# Altium PCB Alim.PcbDoc
Units mm, origin at the board's own origin, x right, y up, seen from the top; angles counter-clockwise.
Board outline 60 x 60 mm, 2 copper layers (Top Layer, Bottom Layer); 35 components, 13 nets, 87 pads, 36 vias.
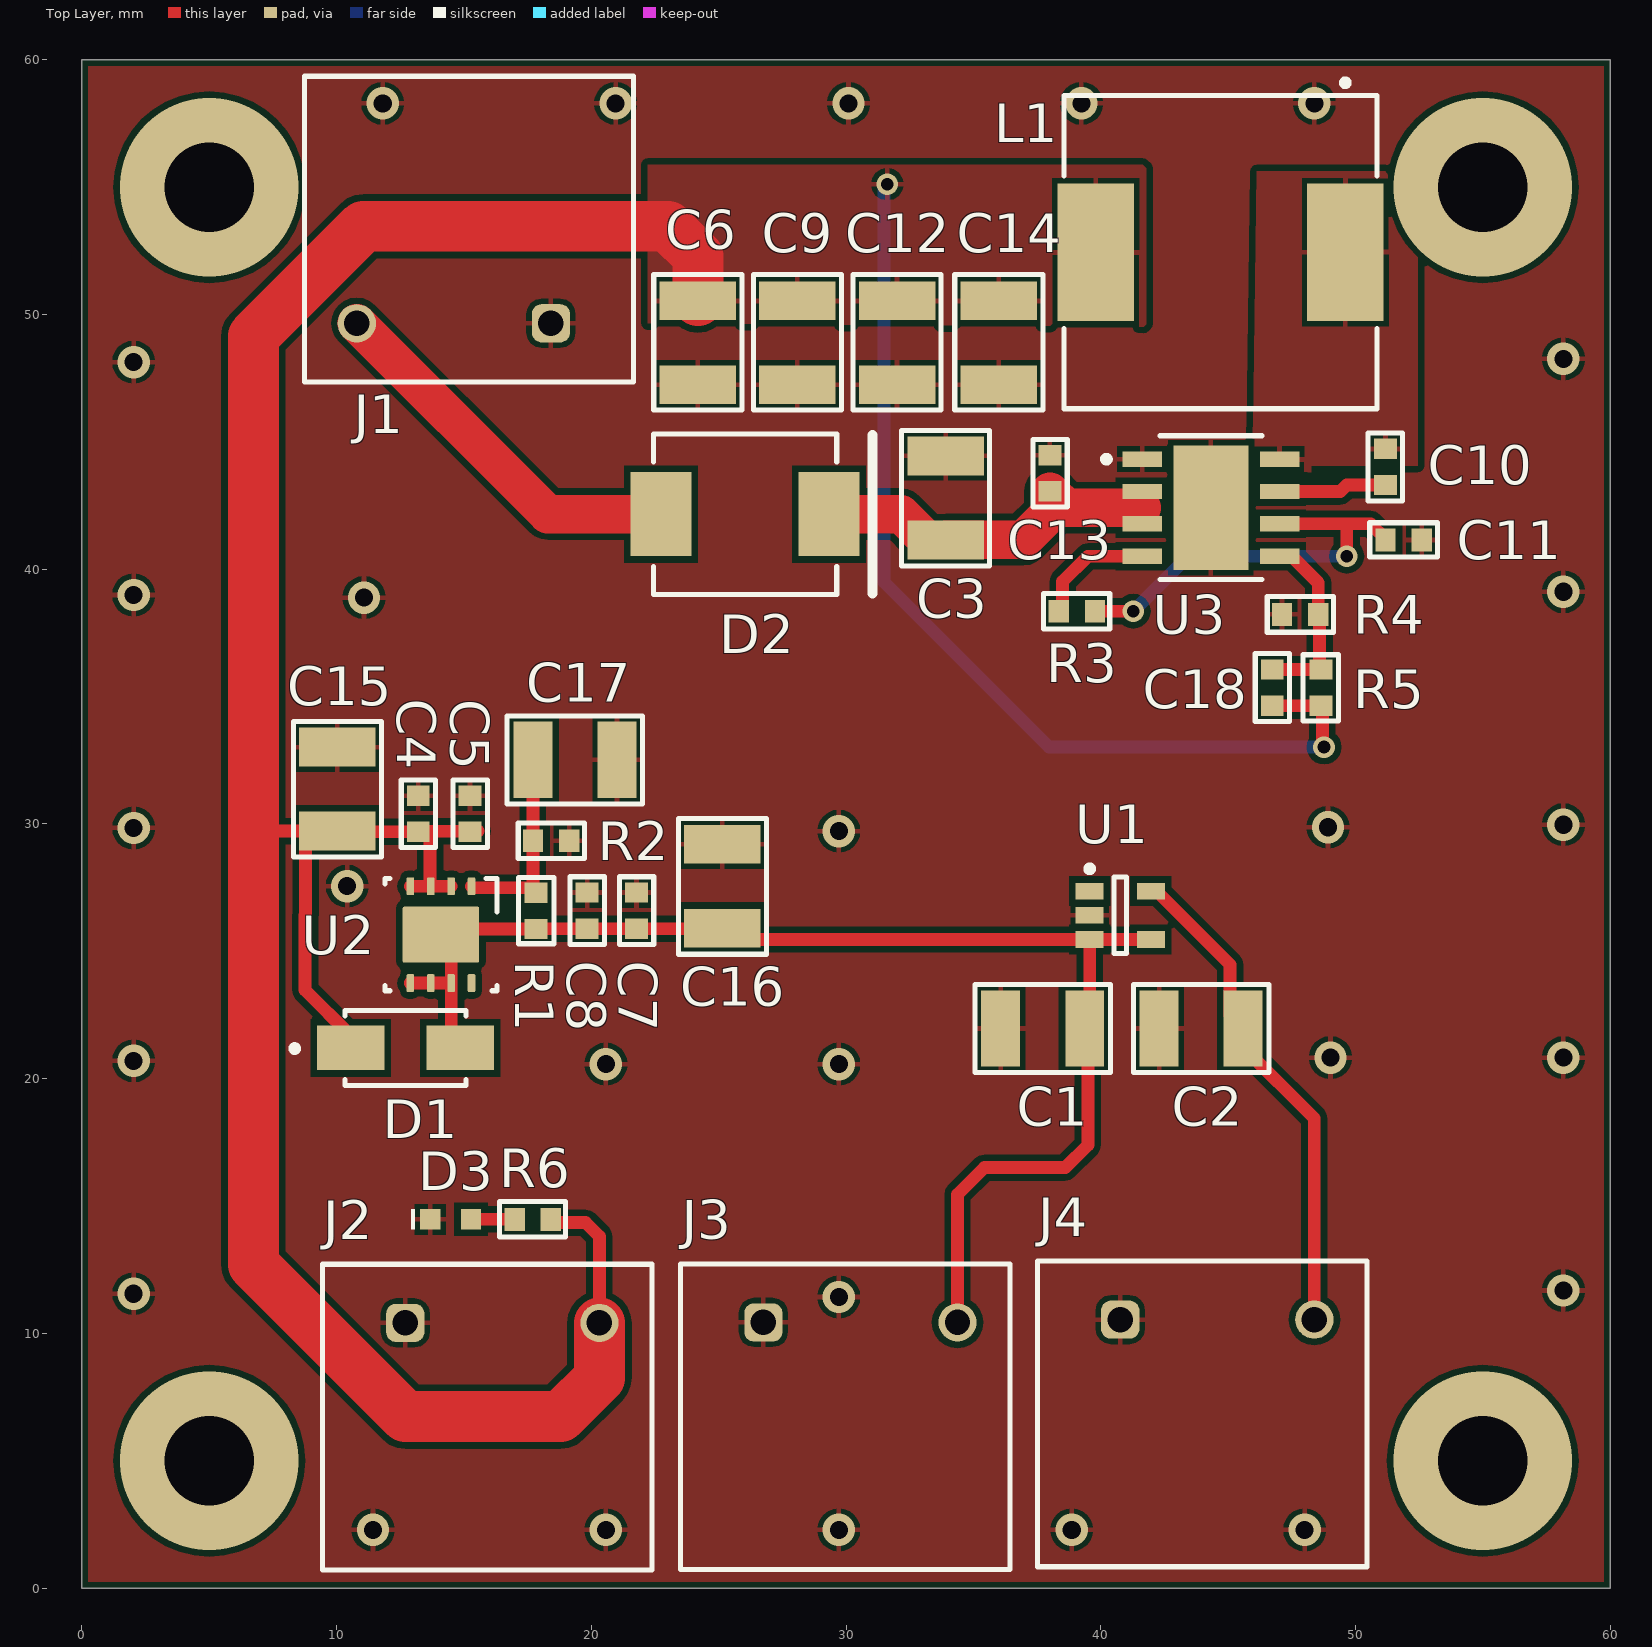
[diagram p0: Top Layer view]
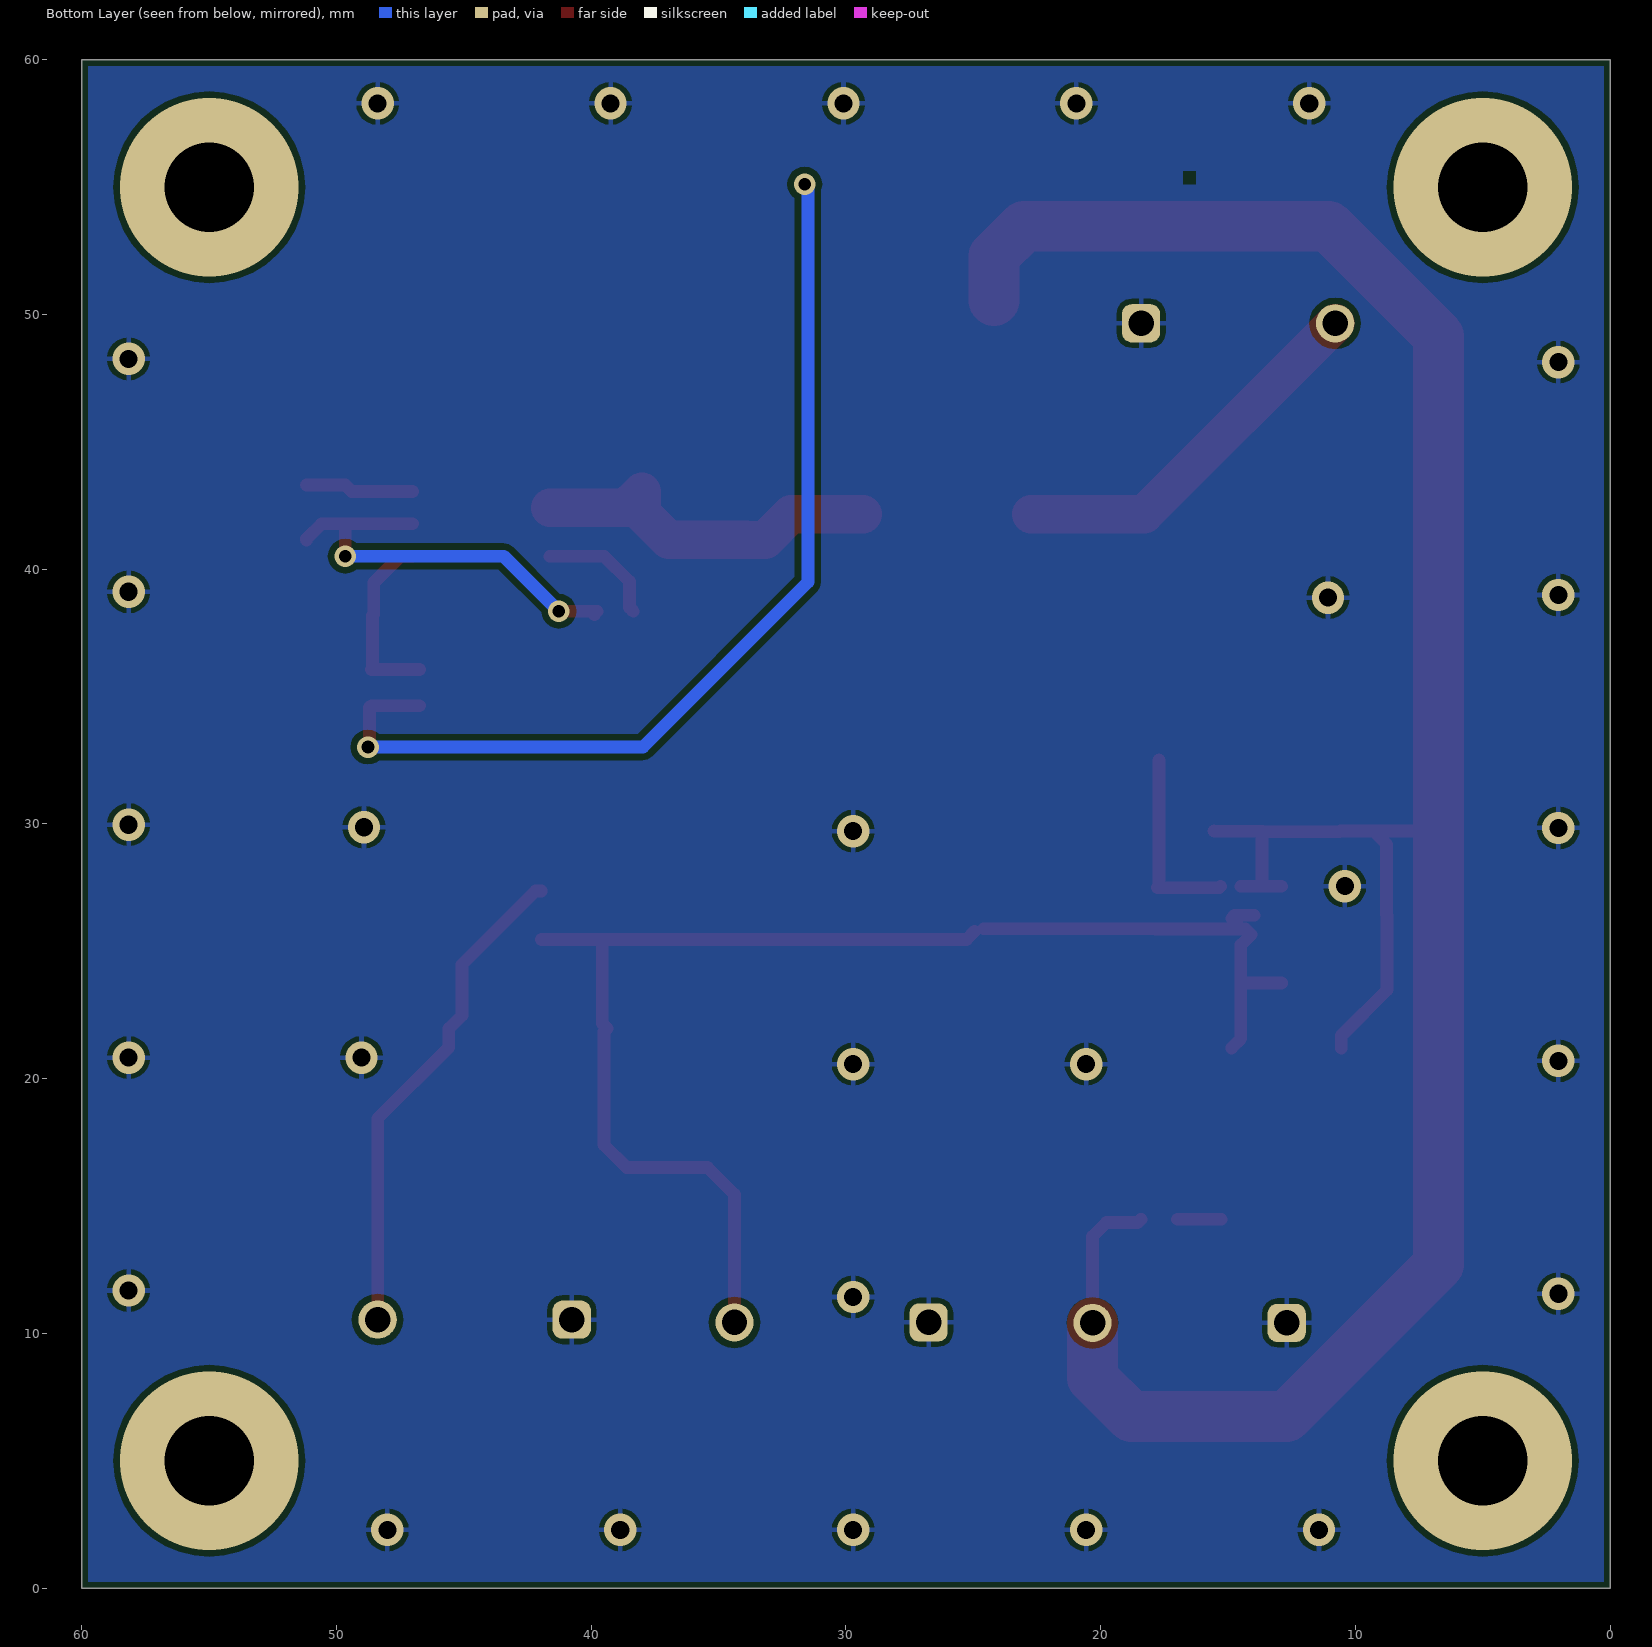
[diagram p1: Bottom Layer view, seen from below]

## Layer stack, top to bottom
Top Solder: solder mask 0.0102, Solder Resist, Dk 3.5
Top Layer: signal copper 0.0356
Dielectric 1: dielectric 0.32, FR-4, Dk 4.8
Bottom Layer: signal copper 0.0356
Bottom Solder: solder mask 0.0102, Solder Resist, Dk 3.5

## Board outline
0,0 0,60 60,60 60,0

## Design rules (kind name [scope] priority, off if disabled: settings)
BoardOutlineClearance [All] p1: gap=0.25 ignorepadtopadclearanceinfootprint=FALSE
Clearance Clearance-xPP-xTP-xTT [All] p1: gap=0.25 ignorepadtopadclearanceinfootprint=FALSE
ComponentClearance [All] p1: gap=0.25 collisioncheckmode=3 verticalgap=0.25 showdistances=FALSE
DiffPairsRouting [All] p1: maxlimit=0.25 minlimit=0.25 mostfreqgap=0.25 toplayer_minwidth=0.381 toplayer_maxwidth=0.381 toplayer_prefwidth=0.381 bottomlayer_minwidth=0.381 bottomlayer_maxwidth=0.381 bottomlayer_prefwidth=0.381 maxuncoupledlength=12.5
Height [All] p1: minheight=0 maxheight=25 prefheight=12.5
HoleSize HoleSize-PTH [All] p1: absolutevalues=TRUE maxlimit=5 minlimit=0.25 maxpercent=80.000 minpercent=20.000
HoleToHoleClearance [All] p1: gap=0.35 allowstackedmicrovias=TRUE
MinimumAnnularRing "Minimum IAR  >0.45mm" [((ObjectKind = 'Pad') OR (ObjectKind = 'Via')) And (Layer = 'MultiLayer') And (HoleDiameter > AsMM(0.45))] p1: minimumring=0.175 // minimum inner annular ring for pads > 0.45mm finished hole size
MinimumAnnularRing "Minimum IAR <=0.45mm" [((ObjectKind = 'Pad') OR (ObjectKind = 'Via')) And (Layer = 'MultiLayer') And (HoleDiameter <= AsMM(0.45))] p2: minimumring=0.175 // minimum inner annular ring for pads <= 0.45mm finished hole size
MinimumSolderMaskSliver [All] p1: minsoldermaskwidth=0.08
NetAntennae [All] p1 off: netantennaetolerance=0
PlaneClearance PlaneClearance-IPI [All] p1: clearance=0.25
PlaneConnect [All] p1: planeconnectstyle=Relief reliefexpansion=0.175 reliefentries=4 reliefconductorwidth=0.2 reliefairgap=0.2
PolygonConnect PolygonConnect-xTW [All] p1: connectstyle=Relief reliefconductorwidth=0.2 reliefentries=4 polygonreliefangle="90 Angle" airgapwidth=0.2
RoutingCorners [All] p1: cornerstyle=45-Degree minsetback=2.5 maxsetback=2.5
RoutingVias "RoutingVias > 0.45mm" [(ObjectKind = 'Via') And (HoleDiameter > AsMM(0.45))] p1: holewidth=0.5 width=0.85 viastyle="Through Hole" minholewidth=0.5 minwidth=0.85 maxholewidth=0.9 maxwidth=1.25 // finishet hole size > 0.45mm
RoutingVias "RoutingVias <= 0.45mm" [(ObjectKind = 'Via') And (HoleDiameter <= AsMM(0.45))] p2: holewidth=0.3 width=0.65 viastyle="Through Hole" minholewidth=0.25 minwidth=0.6 maxholewidth=0.45 maxwidth=0.8 // finishet hole size <= 0.45mm
SilkToSilkClearance [All] p1: silktosilkclearance=0.25
SilkToSolderMaskClearance SilkscreenOverComponentPads [IsPad] p1: minsilkscreentomaskgap=0.2 clearancetoexposedcopper=TRUE
SolderMaskExpansion [All] p1: expansion=0
UnRoutedNet [All] p1: checkbadconnections=TRUE
Width [All] p1: maxlimit=2 minlimit=0.25 preferedwidth=0.5 minimp=50.000000 maximp=50.000000 favimp=50.000000
17 further rules are at their usual default settings.

## Components (designator, comment, footprint, x,y, rotation, side; value= is the part's Value field where it differs from the comment)
C1 "CMS_1210" CONDENSATEUR_CMS_1210 36.07,21.971 r0 top value=10µF
C2 "CMS_1210" CONDENSATEUR_CMS_1210 42.291,21.971 r0 top value=10µF
C3 "CMS_1210" CONDENSATEUR_CMS_1210 33.909,44.45 r270 top value=10µF
C4 "CMS_0603" CONDENSATEUR_CMS_0603 13.208,31.115 r270 top value=1µF
C5 "CMS_0603" CONDENSATEUR_CMS_0603 15.24,31.115 r270 top value=100nF
C6 "CMS_1210" CONDENSATEUR_CMS_1210 24.183,47.246 r90 top value=22µF
C7 "CMS_0603" CONDENSATEUR_CMS_0603 21.774,27.31 r270 top value=1µF
C8 "CMS_0603" CONDENSATEUR_CMS_0603 19.837,27.31 r270 top value=100nF
C9 "CMS_1210" CONDENSATEUR_CMS_1210 28.094,47.246 r90 top value=22µF
C10 "CMS_0603" CONDENSATEUR_CMS_0603 51.181,43.307 r90 top value=0.1µF
C11 "CMS_0603" CONDENSATEUR_CMS_0603 51.181,41.148 r0 top value=1µF
C12 "CMS_1210" CONDENSATEUR_CMS_1210 32.004,47.246 r90 top value=22µF
C13 "CMS_0603" CONDENSATEUR_CMS_0603 38.006,44.482 r270 top value=220nF
C14 "CMS_1210" CONDENSATEUR_CMS_1210 35.999,47.246 r90 top value=22µF
C15 "CMS_1210" CONDENSATEUR_CMS_1210 10.033,33.02 r270 top value=10µF
C16 "CMS_1210" CONDENSATEUR_CMS_1210 25.146,29.208 r270 top value=10µF
C17 "CMS_1210" CONDENSATEUR_CMS_1210 21.01,32.517 r180 top value=10µF
C18 "CMS_0603" CONDENSATEUR_CMS_0603 46.736,36.068 r270 top value=NC
D1 "S1M" DO-214AC 12.709,21.209 r0 top
D2 "S5M" DO-214AB 26.035,42.164 r0 top
D3 "150060RS75000" LED_0603 14.478,14.478 r0 top
J1 "691417420002" 691417420002 15.2,53.357 r180 top locked
J2 "691417420002" 691417420002 15.915,6.714 r0 top locked
J3 "691417420002" 691417420002 29.972,6.731 r0 top locked
J4 "691417420002" 691417420002 43.982,6.841 r0 top locked
L1 "8µH" WE-PDA_1260 44.704,52.451 r270 top
R1 "RESISTANCE_CMS_0603" RESISTANCE_CMS_0603 17.837,27.3 r270 top value=1kOhm
R2 "RESISTANCE_CMS_0603" RESISTANCE_CMS_0603 19.132,29.342 r180 top value=1,58kOhm
R3 "RESISTANCE_CMS_0603" RESISTANCE_CMS_0603 38.354,38.354 r0 top value=NC
R4 "RESISTANCE_CMS_0603" RESISTANCE_CMS_0603 48.539,38.227 r180 top value=24.9kOhm
R5 "RESISTANCE_CMS_0603" RESISTANCE_CMS_0603 48.641,34.646 r90 top value=100kOhm
R6 "RESISTANCE_CMS_0603" RESISTANCE_CMS_0603 16.993,14.478 r0 top value=520Ohm
U1 "LM4128AMF-1.8" SOT23-5 40.767,26.416 r0 top
U2 "TLV1117IDRJR" WSON-8 14.097,25.654 r270 top
U3 "LMR33630ADDAR" HSOIC 44.323,42.418 r0 top

## Footprints (in the part's own frame and the unit in brackets; to place one, negate y for a bottom-side part, rotate by r counter-clockwise, add the part's x,y. Pads: shape width x height; smd on the part's side, far side on the other; paste and mask are expansions set on the pad)
691417420002 [mm] "7.62 mm 45deg Entry Screwless, 2p"
  rrect50% 1.5x1.5 hole 1: 1(-3.215,3.7)
  round 1.5 hole 1: 2(4.405,3.7)
  silkscreen extent -6.47,-6 6.46,6
CONDENSATEUR_CMS_0603 [mm] "CONDENSATEUR CMS 0603 ; DIMENSIONS : 1.6mm x 0.86mm"
  rect 0.8x0.9 smd: 1(0,0) 2(1.422,0)
  silkscreen extent -0.62,-0.67 2.04,0.68
CONDENSATEUR_CMS_1210 [mm] "CONDENSATEUR CMS 1210 ; DIMENSIONS : 3.2mm x 2.5mm"
  rect 1.524x3 smd: 1(0,0) 2(3.3,0)
  silkscreen extent -1,-1.73 4.32,1.73
DO-214AB [mm] "Molded Diode, 2-Leads, Body 7.11x6.22mm"
  rect 2.4x3.3 smd: 1(-3.3,0) 2(3.3,0)
  silkscreen extent -3.6,-3.15 5,3.15
DO-214AC [mm] "SMD Doide"
  rect 2.65x1.75 smd paste+0 mask+0: 1(-2.15,0) 2(2.15,0)
  silkscreen extent -4.47,-1.48 2.37,1.48
HSOIC [mm] "SOIC with power pad"
  rect 1.55x0.6 smd paste+0 mask+0: 1(-2.7,1.905) 2(-2.7,0.635) 3(-2.7,-0.635) 4(-2.7,-1.905) 5(2.7,-1.905) 6(2.7,-0.635) 7(2.7,0.635) 8(2.7,1.905)
  rect 2.95x4.9 smd paste-1000 mask-1000: 9(0,0)
  silkscreen extent -4.22,-2.83 2,2.83
LED_0603 [mm] "SMD Mono-color Chip LED, body 1.6x0.8mm"
  rect 0.8x0.8 smd: 1(-0.8,0) 2(0.8,0)
  silkscreen extent -1.55,-0.4 -1.4,0.4
RESISTANCE_CMS_0603 [mm] "RESISTANCE CMS 0603 ; DIMENSIONS : 1.6mm x 0.8mm"
  rect 0.8x0.9 smd: 1(0,0) 2(1.422,0)
  silkscreen extent -0.6,-0.7 2,0.7
SOT23-5 [mm] "SOT23, 5-Leads, Body 2.9x1.6mm, Pitch 0.95mm, Lead Span 2.8mm, IPC Medium Density"
  rect 1.1x0.65 smd: 1(-1.2,0.95) 2(-1.2,0) 3(-1.2,-0.95) 4(1.2,-0.95) 5(1.2,0.95)
  silkscreen extent -1.32,-1.5 0.25,1.95
WE-PDA_1260 [mm] "SMD Shielded Power Inductor, 2-leads, body 12x12mm"
  rect 5.4x3 smd: 1(0,4.9) 2(0,-4.9)
  silkscreen extent -6.77,-6.15 6.15,6.15
WSON-8 [mm] "SON, 8-Leads, Body 4x4mm, Pitch 0.8mm, Thermal Pad 3x2.2mm, TI Recommended"
  rrect33% 0.7x0.3 smd: 1(-1.9,1.2) 2(-1.9,0.4) 3(-1.9,-0.4) 4(-1.9,-1.2) 5(1.9,-1.2) 6(1.9,-0.4) 7(1.9,0.4) 8(1.9,1.2)
  rrect5% 2.2x3 smd paste-1.1: 9(0,0)
  silkscreen extent -2.2,-2.2 2.2,2.2

## Part data
C1 C2 C3 C6 C9 C12 C14 C15 C16 C17: library part CONDENSATEUR_CMS_CER_1210, "CONDENSATEUR CMS CERAMIQUE 1210", Type=CMS_1210
C4 C5 C7 C8 C10 C11 C13 C18: library part CONDENSATEUR_CMS_CER_0603, "CONDENSATEUR CMS CERAMIQUE 0603", Type=CMS_0603
D1: "DIODE GEN PURP 1KV 1A SMA", Average Rectified Current=1A, Capacitance=12pF, Case/Package=SMA, Forward Voltage=1.1V, Manufacturer 1="ON Semiconductor / Fairchild", Max Forward Surge Current (Ifsm)=30A, Max Operating Temperature=150°C, Max Repetitive Reverse Voltage (Vrrm)=1kV, Max Surge Current=40A, Min Operating Temperature=-55°C, Package Quantity=1, Peak Reverse Current=1uA, Power Dissipation=1.4W, Contact Plating=Tin, Current=1A, Current Rating=1A, Element Configuration=Single, Forward Current=1A, Height=2.2mm, Lead Free="Lead Free", Length=4.75mm, Manufacturer Part Number 1=S1M, Max Reverse Voltage (DC)=1kV, Mount="Surface Mount", Number of Pins=2, Output Current=1A, Packaging="Tape and Reel", Peak Non-Repetitive Surge Current=30A, Polarity=Standard, Radiation Hardening=No, REACH SVHC="No SVHC", Recovery Time=1800ns, Reverse Recovery Time=1.8us, Reverse Voltage=1kV, Termination=SMD/SMT, Voltage=1kV, Voltage Rating (DC)=1kV, Width=5.28mm
D2: "Transient Voltage Suppression Diode, 30 V, -65 to 150 degC, 2-Pin DO-214AB (SMCJ), RoHS, Tape and Reel", Capacitance @ Frequency=-, Current - Peak Pulse (10/1000µs)=31A, Manufacturer=Littelfuse-Inc., Manufacturer 1=Littelfuse, Manufacturer Part Number 1=SMCJ30A, Operating Temperature=-55°C~150°C(TJ), Package / Case=DO-214AB,SMC, Package Description="2-Pin Surface Mount Device, Body 6.855 x 5.905 mm", Package Reference=DO-214AB, Power - Peak Pulse=1500W(1.5kW), Power Line Protection=No, Supplier Device Package=DO-214AB(SMCJ), Voltage - Breakdown (Min)=33.3V, Voltage - Clamping (Max) @ Ipp=48.4V, Voltage - Reverse Standoff (Typ)=30V, Applications=GeneralPurpose, Bidirectional Channels=-, Category=CircuitProtection, Datasheet URL=http://www.littelfuse.com/products/tvs-diodes/surface-mount/~/media/electronics/datasheets/tvs_diodes/littelfuse_tvs_diode_smcj_datasheet.pdf.pdf, Datasheet Version=11/2015, Family=TVS-Diodes, Manufacturer URL=http://www.littelfuse.com/, Mounting Technology=SurfaceMount, Mounting Type=SurfaceMount, Packaging=Digi-Reel®, Series=SMCJ, Type=Zener, Unidirectional Channels=1
D3: library part "LED 150060RS75000", "LED 0603 Générique", Case/Package=0603, Case Code (Metric)=1608, Color=Red, Forward Current=100mA, Forward Voltage=2V, Manufacturer 1="Wurth Electronics", Max Junction Temperature (Tj)=95°C, Max Operating Temperature=85°C, Max Reverse Voltage (DC)=5V, Min Operating Temperature=-40°C, Power Dissipation=72mW, Test Current=20mA, Case Code (Imperial)=0603, Dominant Wavelength=625nm, Height=700µm, Length=1.6mm, Lens Style="Clear, Rectangular", Luminous Intensity=250mcd, Manufacturer Part Number 1=150060RS75000, Mount="Surface Mount", NexarPartId=29717776, Packaging="Tape and Reel", Peak Wavelength=630nm, REACH SVHC=Unknown, Reverse Voltage=5V, RoHS=Compliant, Viewing Angle=140°, Wavelength=625nm, Width=800µm
J1 J2 J3 J4: library part "Bornier 691417420002", "Bornier poussoir 7,62mm", Manufacturer 1="Wurth Electronics", Manufacturer Part Number 1=691417420002, NexarPartId=105951396
L1: library part "Self 784771100", "784771100 Inductor, Aec-Q200, 10Uh, Shld, 5A Rohs Compliant: Yes", Ambient Temperature Range High=85°C, Ambient Temperature Range Low=-40°C, Case/Package=Nonstandard, Current Rating=5A, DC Resistance (DCR)=22mO, Inductance=10µH, Manufacturer 1="Wurth Electronics", Manufacturer Part Number 1=784771100, Max Operating Temperature=125°C, Ratings=AEC-Q200, Saturation Current=5.25A, Self Resonant Frequency=22.3MHz, Test Frequency=100kHz, Tolerance=20%, Composition=Wirewound, Core Material=Ferrite, Height=6mm, Height - Seated (Max)=6.2992mm, Length=12mm, Min Operating Temperature=-40°C, Mount="Surface Mount", NexarPartId=56466860, Number of Pins=2, RoHS=Compliant, Shielding=Shielded, Width=12mm
R1 R2 R3 R4 R5 R6: "RESISTANCE CMS 0603", Type=CMS_0603
U1: "Precision Micropower Series Voltage Reference, 5-pin SOT-23", Manufacturer="National Semiconductor", Manufacturer 1="TI National Semiconductor", PackageTopMarking=R5AA*XTT, PowerWise=Y, ComponentLink1Description="LM4128 Datasheet", ComponentLink1URL=http://www.national.com/ds/LM/LM4128.pdf, ComponentLink2Description="LM4128 Web Page", ComponentLink2URL=http://www.national.com/pf/LM/LM4128.html, ComponentLink3Description="MF05A Package Page", ComponentLink3URL=http://www.national.com/packaging/folders/mf05a.html, CompType="Voltage Reference IC", DatasheetVersion=Nov-2006, Manufacturer Part Number 1=LM4128AMF-1.8, PackageDescription="Molded SOT-23, .115 x .063 x .040 in Body, 5 Lead, .0375 in Pitch", PackageReference=MF05A, PackageVersion="revD, Aug-2008", PinCount=5, RevisionNote="Component URLs added", RoHS=N
U2: "LDO with 2.7 to 15 V Input and 1.25 to 13.7 V Output, -40 to 125 degC, 8-Pin SON (DRJ), Green (RoHS & no Sb/Br)", Manufacturer="Texas Instruments", ComponentLink1Description=Datasheet, ComponentLink1URL=http://www.ti.com/general/docs/lit/getliterature.tsp?genericPartNumber=TLV1117&fileType=pdf, ComponentLink2Description="Package Specification", ComponentLink2URL=http://www.ti.com/litv/pdf/mpds153b, ComponentLink3Description="URL Link1", ComponentLink3URL="Samples URL:http://www.ti.com/product/tlv1117#samples", DatasheetVersion=SLVS561J, Eco-Plan="Green (RoHS & no Sb/Br)", Iout(Max)(A)=0.8, Iq(Typ)(mA)=5, Manufacturer 1="Texas Instruments", Manufacturer Part Number 1=TLV1117IDRJR, Mounting Technology="Surface Mount", PackageDescription="8-Pin Plastic Small Outline No-Lead, 4 x 4 x 0.8 mm Body, 0.8 mm Pitch, Exposed Pad", PackageReference=DRJ0008A, PackageVersion="revC, Dec-2010", PartNumber=TLV1117IDRJR, Vin(Max)(V)=15, Vin(Min)(V)=2.7, Vout(Max)(V)=13.7, Vout(Min)(V)=1.25
U3: "IC REG BUCK ADJUSTABLE 3A 8SOPWR", Manufacturer 1="Texas Instruments", Max Input Voltage=36V, Max Operating Temperature=125°C, Max Output Voltage=24V, Min Input Voltage=3.8V, Min Operating Temperature=-40°C, Min Output Voltage=1V, Output Current=3A, Switching Frequency=400kHz, Manufacturer Part Number 1=LMR33630ADDAR, Mount="Surface Mount", Number of Outputs=1, Number of Pins=8, Output Configuration=Positive, Output Type=Adjustable, Packaging="Cut Tape", RoHS Compliant=Yes, Synchronous Rectifier=Yes

## Via types
v1: diameter 1.27, hole 0.711, Top Layer to Bottom Layer, 28 vias
v2: diameter 0.85, hole 0.5, Top Layer to Bottom Layer, 4 vias
v3: diameter 7, hole 3.5, Top Layer to Bottom Layer, 4 vias

## Nets (pads, with @x,y where several pads share a name; then routed paths per layer and width w, separated by ;. In a path a pad name is that pad's centre, name@x,y a point inside that pad or via, vN(x,y) a via of type N, cw(c..) or ccw(c..) an arc to the next point about the centre after c; other vN are vias at no path point)
+1V8: C2.2 J4.2 U1.5 | length 19.6
  Top Layer w0.5: U1.5 42.192,27.366 45.079,24.479 45.079,22.483 C2.2 45.591,21.233 48.387,18.437 J4.2
+3V3: C1.2 C7.2 C8.2 C16.2 D1.2 J3.2 R1.2 U1.3 U1.4 U2.5 U2.6 U2.7 U2.9 | length 54.5
  Top Layer w0.5: U2.5 U2.6 U2.7 ; U2.9@13.97,26.416 14.751,26.416 14.853,26.297 14.859,26.289 U2.9@14.624,26.054 ; D1.2 14.497,21.571 U2.7 ; C16.2@24.593,25.888 C7.2 21.769,25.883 17.842,25.883 R1.2 14.321,25.878 U2.9 14.497,25.254 U2.7 ; C16.2@24.949,25.788 25.271,25.466 U1.3 ; J3.2 34.377,15.454 35.433,16.51 38.608,16.51 39.497,17.399 39.497,21.844 C1.2 39.567,22.168 U1.3 ; U1.4 U1.3
+5V: C4.2 C5.2 C6.2 C9.2 C12.2 C14.2 C15.2 C18.2 D1.1 J2.2 L1.2 R5.1 R6.2 U2.2 U2.3 U2.4 | length 144.4
  Top Layer w0.5: 6.731,29.723 10.598,29.723 10.623,29.698 C4.2@13.646,29.698 ; C15.2 9.295,29.72 8.783,29.208 8.783,26.436 8.763,26.416 8.763,23.484 10.559,21.688 D1.1 ; U2.4 U2.3 ; U2.2 U2.3 ; C5.2@15.551,29.723 15.538,29.71 13.659,29.71 C4.2@13.646,29.698 ; R6.2 18.542,14.351 19.773,14.351 20.32,13.804 J2.2 ; C18.2 R5.1 48.704,34.582 48.704,33.084 v2(48.768,33.02) ; C4.2@13.646,29.698 13.671,29.672 13.671,27.58 U2.3
  Top Layer w2: J2.2 20.32,8.255 18.796,6.731 12.7,6.731 6.731,12.7 6.731,29.723 6.731,49.149 11.049,53.467 23.012,53.467 24.183,52.295 C6.2
  Bottom Layer w0.5: v2(31.623,55.118) 31.496,54.991 31.496,39.497 37.973,33.02 v2(48.768,33.02)
+12V: D2.1 J1.2 | length 15
  Top Layer w1.5: J1.2 18.288,42.164 D2.1
GND: C1.1 C2.1 C3.1 C4.1 C5.1 C6.1 C7.1 C8.1 C9.1 C11.2 C12.1 C13.1 C14.1 C15.1 C16.1 C17.1 D3.1 J1.1 J2.1 J3.1 J4.1 R2.1 R4.2 U1.2 U3.1 U3.9
  other v1: 11.43,2.286 20.574,2.286 29.718,2.286 38.862,2.286 48.006,2.286 29.718,11.43 2.032,11.557 58.166,11.684 20.574,20.574 29.718,20.574 2.032,20.701 49.022,20.828 58.166,20.828 10.414,27.559 29.718,29.718 2.032,29.845 48.922,29.872 58.166,29.972 11.076,38.889 2.032,38.989 58.166,39.116 2.032,48.133 58.166,48.26 11.811,58.293 20.955,58.293 30.099,58.293 39.243,58.293 48.387,58.293
NetC3_2: C3.2 C13.2 D2.2 U3.2 U3.3 | length 14.3
  Top Layer w0.5: C13.2@37.796,43.028 37.846,43.028 C13.2@37.859,43.04
  Top Layer w1.5: D2.2 32.157,42.164 33.171,41.15 C3.2 33.921,41.162 36.971,41.162 38.006,42.197 C13.2 38.648,42.418 41.623,42.418
NetC10_1: C10.1 U3.7 | length 4.3
  Top Layer w0.5: U3.7 49.403,43.053 49.657,43.307 C10.1
NetC10_2: C10.2 L1.1 U3.8
NetC11_1: C11.1 R3.2 U3.6 | length 16.7
  Top Layer w0.5: R3.2@39.878,38.227 39.878,38.252 R3.2 v2(41.275,38.354) ; U3.6 49.657,41.783 ; v2(49.657,40.513) 49.657,41.783 ; C11.1 51.181,41.198 50.596,41.783 49.657,41.783
  Bottom Layer w0.5: v2(41.275,38.354) 43.434,40.513 v2(49.657,40.513)
NetC17_2: C17.2 R1.1 R2.2 U2.1 | length 7.5
  Top Layer w0.5: U2.1 15.355,27.495 R1.1@17.779,27.495 ; R1.1@17.71,27.564 R2.2 C17.2
NetC18_1: C18.1 R4.1 R5.2 U3.5 | length 7.3
  Top Layer w0.5: C18.1 R5.2 48.59,36.119 48.59,38.176 R4.1 48.539,39.472 47.498,40.513 U3.5
NetD3_2: D3.2 R6.1 | length 1.7
  Top Layer w0.5: D3.2 R6.1
VCC/PG: R3.1 U3.4 | length 4.8
  Top Layer w0.5: R3.1 38.504,38.504 38.504,39.52 39.497,40.513 U3.4
pads on no net: U1.1 U2.8
copper on no net:
  other v3: 5,5 55,5 5,55 55,55

## Polygon pours and split planes (outlines as drawn)
GND on Top Layer (solid, pour order 22): -1.016,60.706 -0.762,60.452 60.706,60.452 60.706,-2.413 60.452,-2.667 -1.778,-2.667 -1.778,60.325 -1.524,60.579
no net on Top Layer (solid, pour order 10): 27.432,43.942
NetC10_2 on Top Layer (solid, pour order 8): 46.127,55.626 52.451,55.626 52.451,51.689 52.451,44.069 48.26,44.069 48.26,43.815 45.974,43.815 45.974,45.593 45.997,45.593
+5V on Top Layer (solid, pour order 6): 22.225,55.88 22.225,49.657 41.783,49.53 41.783,55.753 41.656,55.88 37.211,55.88
GND on Bottom Layer (solid, pour order 20): -3.302,61.976 61.522,61.976 61.522,-3.483 -3.302,-3.483